# Altium PCB PCB.PcbDoc
Units mm, origin at the board's own origin, x right, y up, seen from the top; angles counter-clockwise.
Board outline 70.15 x 37.39 mm, 2 copper layers (Top Layer, Bottom Layer), stack 1.071 mm thick; 14 components, 0 nets, 36 pads, 58 vias.
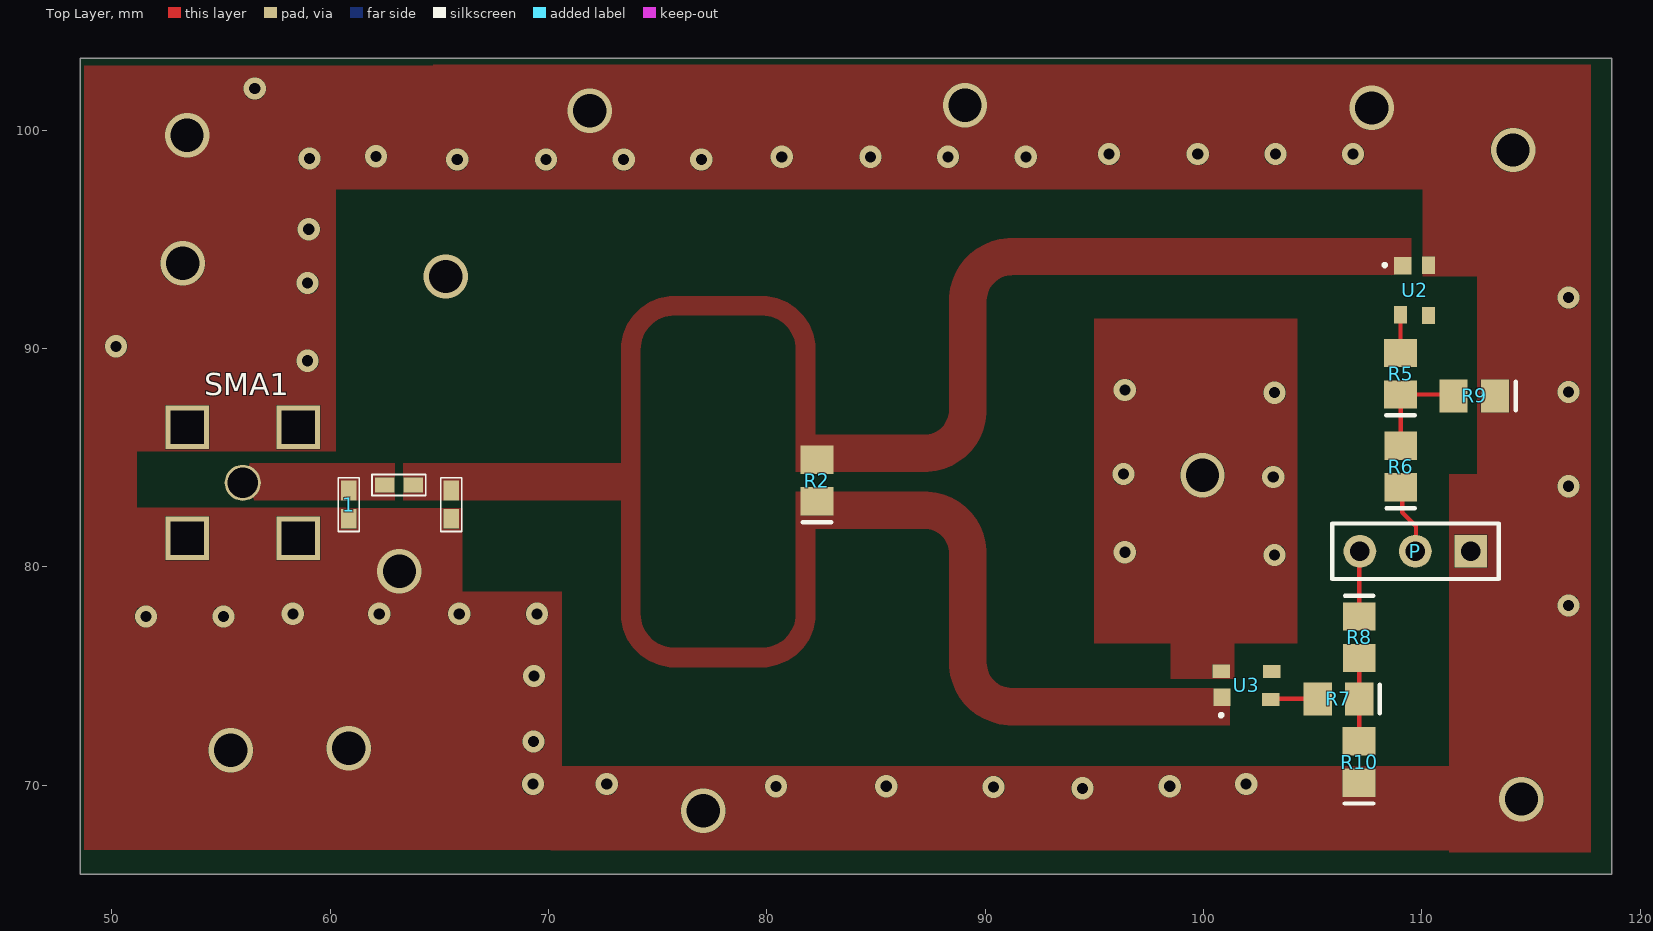
[diagram p0: Top Layer view]
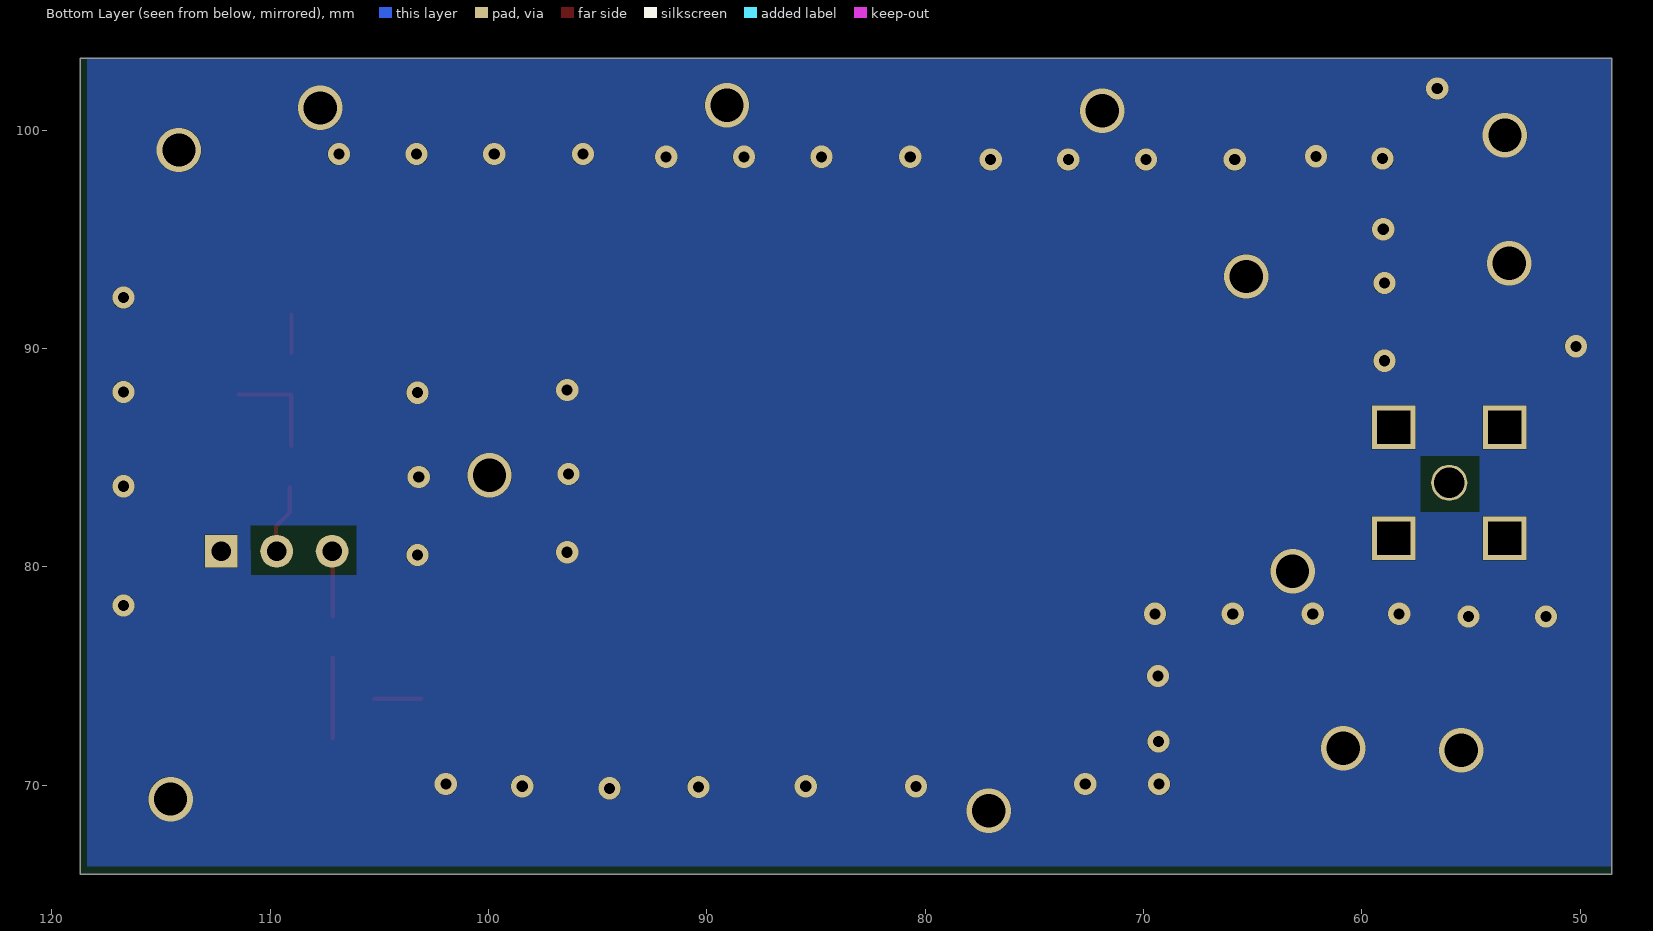
[diagram p1: Bottom Layer view, seen from below]

## Layer stack, top to bottom
Top Solder: solder mask 0.0102, Solder Resist, Dk 3.5
Top Layer: signal copper 0.0356
Dielectric 1: dielectric 1, FR-4, Dk 4.8
Bottom Layer: signal copper 0.0356
Bottom Solder: solder mask 0.0102, Solder Resist, Dk 3.5

## Board outline
48.55,65.913 48.55,103.3 118.7,103.3 118.7,65.913

## Design rules (kind name [scope] priority, off if disabled: settings)
Clearance [All] p1: gap=0 ignorepadtopadclearanceinfootprint=FALSE
ComponentClearance [All] p1: gap=0 collisioncheckmode=3 verticalgap=0 showdistances=FALSE
HoleSize [All] p1: absolutevalues=TRUE maxlimit=25.4 minlimit=0.025 maxpercent=80.000 minpercent=20.000
HoleToHoleClearance [All] p1: gap=0.152 allowstackedmicrovias=TRUE
MinimumSolderMaskSliver [All] p1: minsoldermaskwidth=0.102
PolygonConnect [All] p1: thpad.connectstyle=Direct thpad.reliefconductorwidth=0.254 thpad.reliefentries=4 thpad.polygonreliefangle="90 Angle" thpad.airgapwidth=0.254 smdpad.connectstyle=Relief smdpad.reliefconductorwidth=0.254 smdpad.reliefentries=4 smdpad.polygonreliefangle="90 Angle" smdpad.airgapwidth=0.254 via.connectstyle=Direct via.reliefconductorwidth=0.254 via.reliefentries=4 via.polygonreliefangle="90 Angle" via.airgapwidth=0.254
RoutingVias [All] p1: holewidth=0.305 width=0.508 viastyle="Through Hole" minholewidth=0.305 minwidth=0.508 maxholewidth=0.305 maxwidth=0.508
SilkToSilkClearance [All] p1: silktosilkclearance=0
SilkToSolderMaskClearance [IsPad] p1: minsilkscreentomaskgap=0 clearancetoexposedcopper=TRUE
SolderMaskExpansion [All] p1: expansion=0.102
Width [All] p1: maxlimit=1.27 minlimit=0.152 preferedwidth=0.203
24 further rules are at their usual default settings.

## Components (designator, comment, footprint, x,y, rotation, side; value= is the part's Value field where it differs from the comment)
1 "Inductor" 0402 60.85,82.85 r90 top value=10nH (schematic designator L2)
L2 "Inductor" 0402 65.547,82.85 r90 top value=10nH
L2 "Inductor" 0402 63.15,83.75 r0 top value=10nH
P "MHDR1X3" HDR1X3 112.239,80.716 r180 top
R2 "Resistor" 0805 82.296,83.947 r90 top (schematic designator R)
R5 "Resistor" 0805 109.018,88.844 r90 top (schematic designator R)
R6 "Resistor" 0805 109.028,84.589 r90 top (schematic designator R)
R7 "Resistor" 0805 106.172,73.953 r180 top (schematic designator R)
R8 "Resistor" 0805 107.127,76.779 r270 top (schematic designator R)
R9 "Resistor" 0805 112.395,87.828 r180 top (schematic designator R)
R10 "Resistor" 0805 107.122,71.064 r90 top (schematic designator R)
SMA1 "SMA Port" "SMA - Hole - 5 Pin" 56,83.85 r0 top value="Do Not Stuff" (schematic designator SMA)
U2 "4FZ" SOT343 109.638,92.771 r0 top
U3 "4FZ" SOT343 101.854,74.549 r90 top (schematic designator U2)

## Footprints (in the part's own frame and the unit in brackets; to place one, negate y for a bottom-side part, rotate by r counter-clockwise, add the part's x,y. Pads: shape width x height; smd on the part's side, far side on the other; paste and mask are expansions set on the pad)
0402 [mm] "Chip Capacitor; Body 1.0 x 0.5 mm (LxW typ)"
  rect 0.9x0.7 smd: 1(-0.65,0) 2(0.65,0)
  silkscreen extent -1.23,-0.48 1.23,0.48
0805 [mm] "Chip Capacitor; Body 2.0 x 1.2 mm (LxW typ)"
  rect 1.3x1.5 smd: 1(-0.95,0) 2(0.95,0)
  silkscreen extent -1.9,-0.65 -1.9,0.65, body extent -0.97,-0.66 1.03,0.6, height 0.43
HDR1X3 [mm] "Connector; Header; 3 Position"
  rect 1.5x1.5 hole 0.9: 1(0,0)
  round 1.5 hole 0.9: 2(2.54,0) 3(5.08,0)
  silkscreen extent -1.27,-1.27 6.35,1.27, body extent -1.27,-1.27 6.35,1.27, height 8.38
"SMA - Hole - 5 Pin" [mm]
  round 1.65 hole 1.4: 1(0,0)
  rect 2x2 hole 1.5 square: 2(-2.54,-2.54) 2(-2.54,2.54) 2(2.54,-2.54) 2(2.54,2.54)
  body extent -4.19,-4.27 3.25,3.15, height 9.72
SOT343 [mm]
  rect 0.8x0.8 smd: 1(-0.51,1.01)
  rect 0.6x0.8 smd: 2(0.67,1.05) 3(0.66,-1.26) 4(-0.62,-1.22)
  silkscreen extent -1.36,1.03 -1.32,1.07, body extent -1.04,-1.19 1.06,1.11, height 1

## Part data
P: "Header, 3-Pin", LatestRevisionDate=17-Jul-2002, LatestRevisionNote="Re-released for DXP Platform.", Publisher="Altium Limited"
R2 R5 R6 R7 R8 R9 R10: "Thick Film Resistor", Vaule=100k
SMA1: library part "SMA Port_1", "5  pin SMA connector wisp"
1 L2 L2: Code_IPC=2012[0805], Code_JEITA=0805

## Via types
v1: diameter 1.016, hole 0.508, Top Layer to Bottom Layer, 45 vias
v2: diameter 2.032, hole 1.524, Top Layer to Bottom Layer, 13 vias

## Nets (pads, with @x,y where several pads share a name; then routed paths per layer and width w, separated by ;. In a path a pad name is that pad's centre, name@x,y a point inside that pad or via, vN(x,y) a via of type N, cw(c..) or ccw(c..) an arc to the next point about the centre after c; other vN are vias at no path point)
pads on no net: 1.1 1.2 L2.1 L2.2 P.1 P.2 P.3 R2.1 R2.2 R5.1 R5.2 R6.1 R6.2 R7.1 R7.2 R8.1 R8.2 R9.1 R9.2 R10.1 R10.2 SMA1.1 SMA1.2 U2.1 U2.2 U2.3 U2.4 U3.1 U3.2 U3.3 U3.4
copper on no net: | length 18.5
  Top Layer w0.203: 103.074,73.953 105.222,73.953 ; 107.122,72.143 107.122,73.953 107.122,75.829 ; 107.127,77.729 107.127,80.716 ; 109.018,89.794 109.018,91.551 ; 109.028,85.539 109.028,87.894 ; 109.083,87.894 111.445,87.894 ; 109.093,83.639 109.093,82.494 109.728,81.859 109.728,80.716
  other v1: 94.45,69.859 90.386,69.923 80.419,69.951 85.469,69.952 98.45,69.952 69.288,70.051 72.669,70.051 101.95,70.05 69.319,72.001 69.339,75.001 51.562,77.729 55.118,77.729 58.293,77.851 62.25,77.85 65.913,77.851 69.469,77.851 116.713,78.232 103.251,80.544 96.393,80.671 116.713,83.693 103.19,84.121 96.332,84.248 103.251,87.976 116.713,88.011 96.393,88.103 58.971,89.437 50.2,90.1 116.713,92.329 58.971,92.993 59.021,95.462 65.824,98.65 69.888,98.65 73.444,98.65 77,98.65 59.05,98.7 80.683,98.777 84.747,98.777 88.303,98.777 91.859,98.777 62.1,98.8 95.669,98.904 99.733,98.904 103.289,98.904 106.845,98.904 56.55,101.9
  other v2: 77.089,68.834 114.554,69.366 55.449,71.598 60.85,71.7 63.175,79.798 99.949,84.201 65.3,93.3 53.25,93.9 114.173,99.089 53.45,99.771 71.886,100.89 107.7,101.017 89.075,101.144

## Polygon pours and split planes (outlines as drawn)
no net on Top Layer "Top Layer-No Net 10" (solid, pour order 50): 65.391,101.595 65.391,97.3 59.786,97.3 59.786,101.595
no net on Top Layer "Top Layer-No Net 10" (solid, pour order 48): 60.829,82.7 60.829,78.469 50.295,78.469 50.295,82.7
no net on Top Layer "Top Layer-No Net 10" (solid, pour order 46): 60.25,100.75 60.25,85.3 50.697,85.3 50.697,100.75
no net on Top Layer "Top Layer-No Net 10" (solid, pour order 44): 66.05,82.695 66.05,78.4 60.445,78.4 60.446,82.695
no net on Top Layer "Top Layer-No Net" (solid, pour order 42): 55,83.051 62.95,83.051 62.95,84.751 55,84.751
no net on Top Layer "Top Layer-No Net 1" (solid, pour order 41): 73.335,77.851 ccw(c75.772,77.851) 75.772,75.414 79.772,75.414 ccw(c79.772,77.851) 82.209,77.851 82.209,81.751 87.209,81.751 cw(c87.209,80.601) 88.359,80.601 88.359,75.601 ccw(c91.209,75.601) 91.209,72.751 101.209,72.751 101.209,74.451 91.209,74.451 cw(c91.209,75.601) 90.059,75.601 90.059,80.601 ccw(c87.209,80.601) 87.209,83.451 81.335,83.451 81.335,77.851 cw(c79.772,77.851) 79.772,76.288 75.772,76.288 cw(c75.772,77.851) 74.209,77.851 74.209,89.951 cw(c75.772,89.951) 75.772,91.514 79.772,91.514 cw(c79.772,89.951) 81.335,89.951 81.335,84.351 87.209,84.351 ccw(c87.209,87.201) 90.059,87.201 90.059,92.201 cw(c91.209,92.201) 91.209,93.351 109.509,93.351 109.509,95.051 91.209,95.051 ccw(c91.209,92.201) 88.359,92.201 88.359,87.201 cw(c87.209,87.201) 87.209,86.051 82.209,86.051 82.209,89.951 ccw(c79.772,89.951) 79.772,92.388 75.772,92.388 ccw(c75.772,89.951) 73.335,89.951 73.335,84.751 63.35,84.751 63.35,83.051 73.335,83.051
no net on Top Layer "Top Layer-No Net 10" (solid, pour order 39): 115.252,99.695 115.252,93.298 110.045,93.298 110.045,99.695
no net on Top Layer "Top Layer-No Net 10" (solid, pour order 37): 64.723,103 117.729,103 117.729,97.3 64.723,97.3
no net on Top Layer "Top Layer-No Net 10" (solid, pour order 35): 48.75,78.55 48.75,101.05 51.141,101.05 51.141,78.55
no net on Top Layer "Top Layer-No Net 10" (solid, pour order 31): 117.729,100.55 48.75,100.55 48.75,102.95 117.729,102.95
no net on Top Layer "Top Layer-No Net 10" (solid, pour order 29): 117.729,101.52 117.729,84.193 112.522,84.193 112.522,101.52
no net on Top Layer "Top Layer-No Net 10" (solid, pour order 23): 94.996,91.355 104.293,91.355 104.293,76.494 94.996,76.494
no net on Top Layer "Top Layer-No Net 10" (solid, pour order 21): 98.503,78.784 101.396,78.784 101.396,74.886 98.503,74.886
no net on Top Layer "Top Layer-No Net 10" (solid, pour order 11): 117.729,84.248 117.729,66.921 111.252,66.921 111.252,84.248
no net on Top Layer "Top Layer-No Net 10" (solid, pour order 9): 117.475,67.034 70.094,67.034 70.094,70.866 117.475,70.866
no net on Top Layer "Top Layer-No Net 10" (solid, pour order 7): 70.612,67.056 48.75,67.056 48.75,78.867 70.612,78.867
no net on Top Solder (solid): 75.565,77.343 75.565,89.623 80.391,89.623 80.391,77.343
no net on Bottom Layer "Bottom Layer-No Net" (solid, pour order 24): 48.55,66.294 48.55,103.3 118.364,103.3 118.364,66.294

## Other copper
Bottom Layer:
  pour cut-out: 106.045,79.629 106.045,81.878 110.877,81.878 110.871,79.629
  pour cut-out: 54.633,85.072 57.3,85.072 57.3,82.528 54.633,82.535

## Silkscreen, mask and mechanical layers (free items; w line width, h text height)
Mechanical 1:
  the board outline again, w0.254